# Altium PCB PCB4302.PcbDoc (part 1 of 2)
Units mil, origin at the board's own origin, x right, y up, seen from the top; angles counter-clockwise.
Board outline 1574.8 x 1476.38 mil, 4 copper layers (Top, Inner Layer 2, Inner Layer 3, Bottom), stack 35.4 mil thick; 37 components, 68 nets, 208 pads, 290 vias.
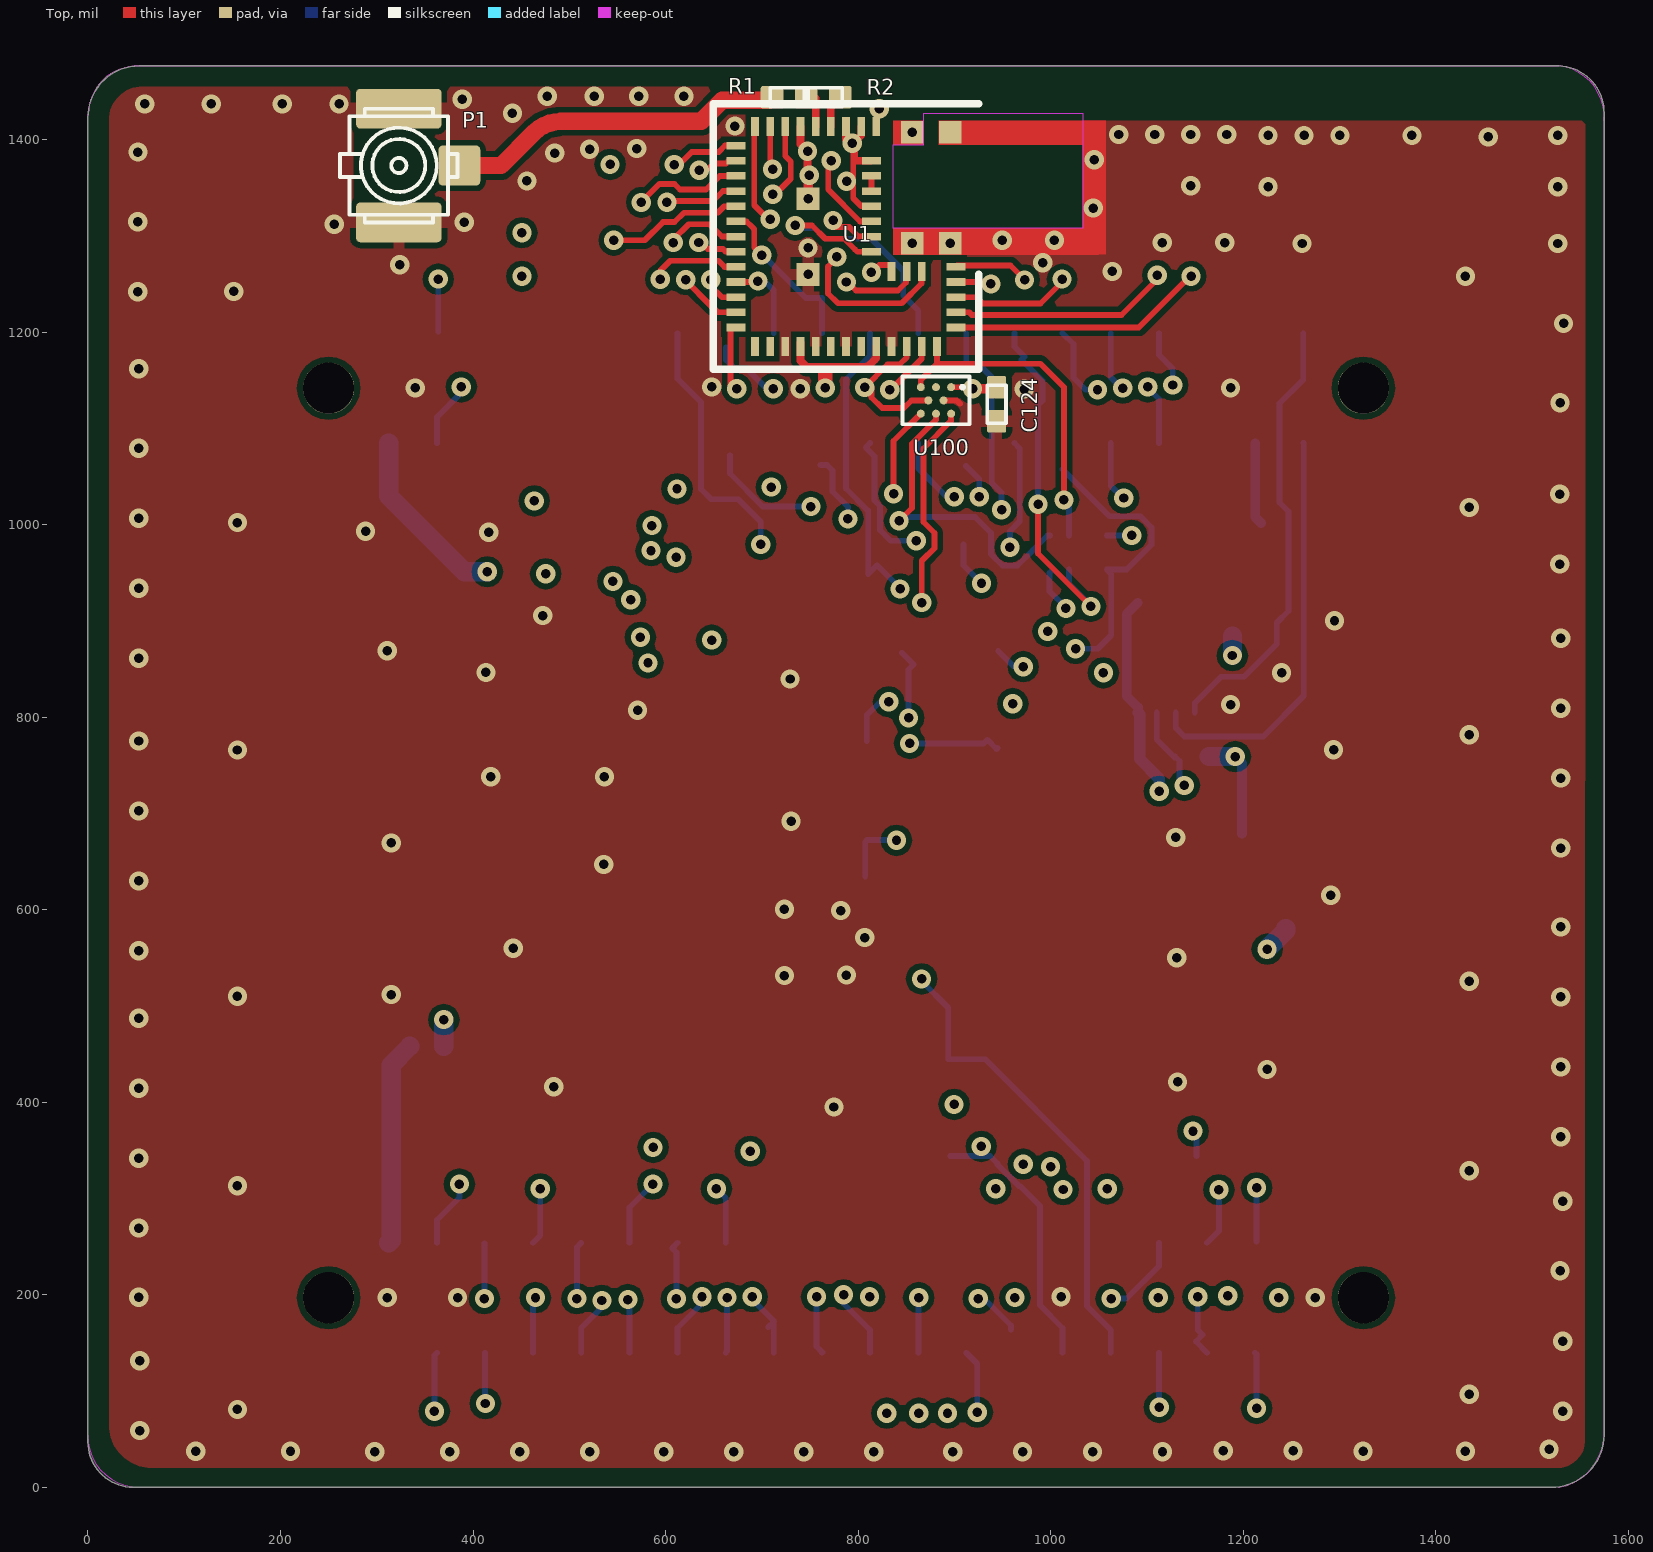
[diagram p0: Top view]
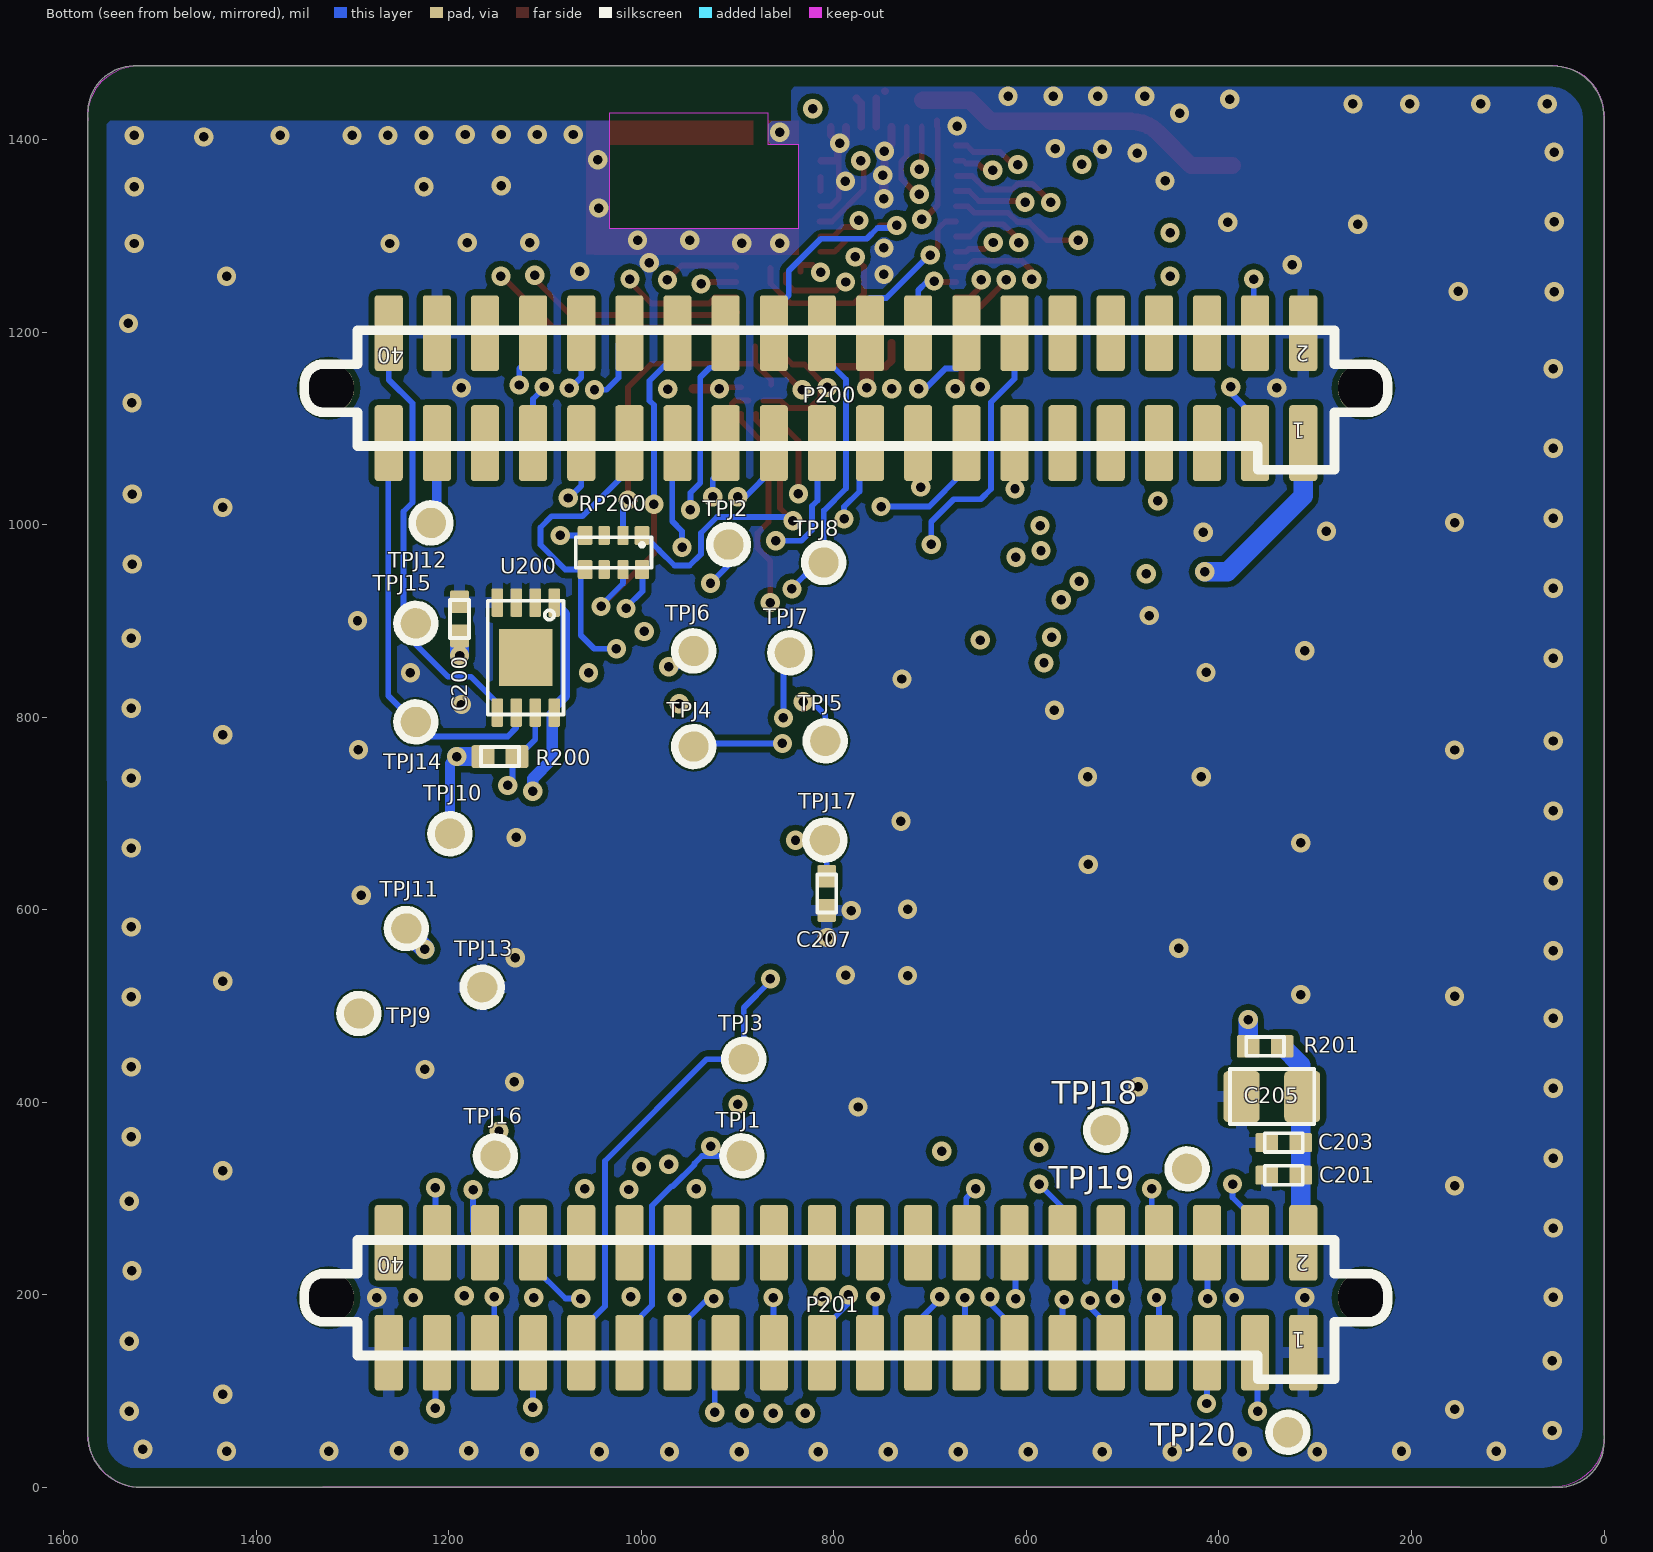
[diagram p1: Bottom view, seen from below]
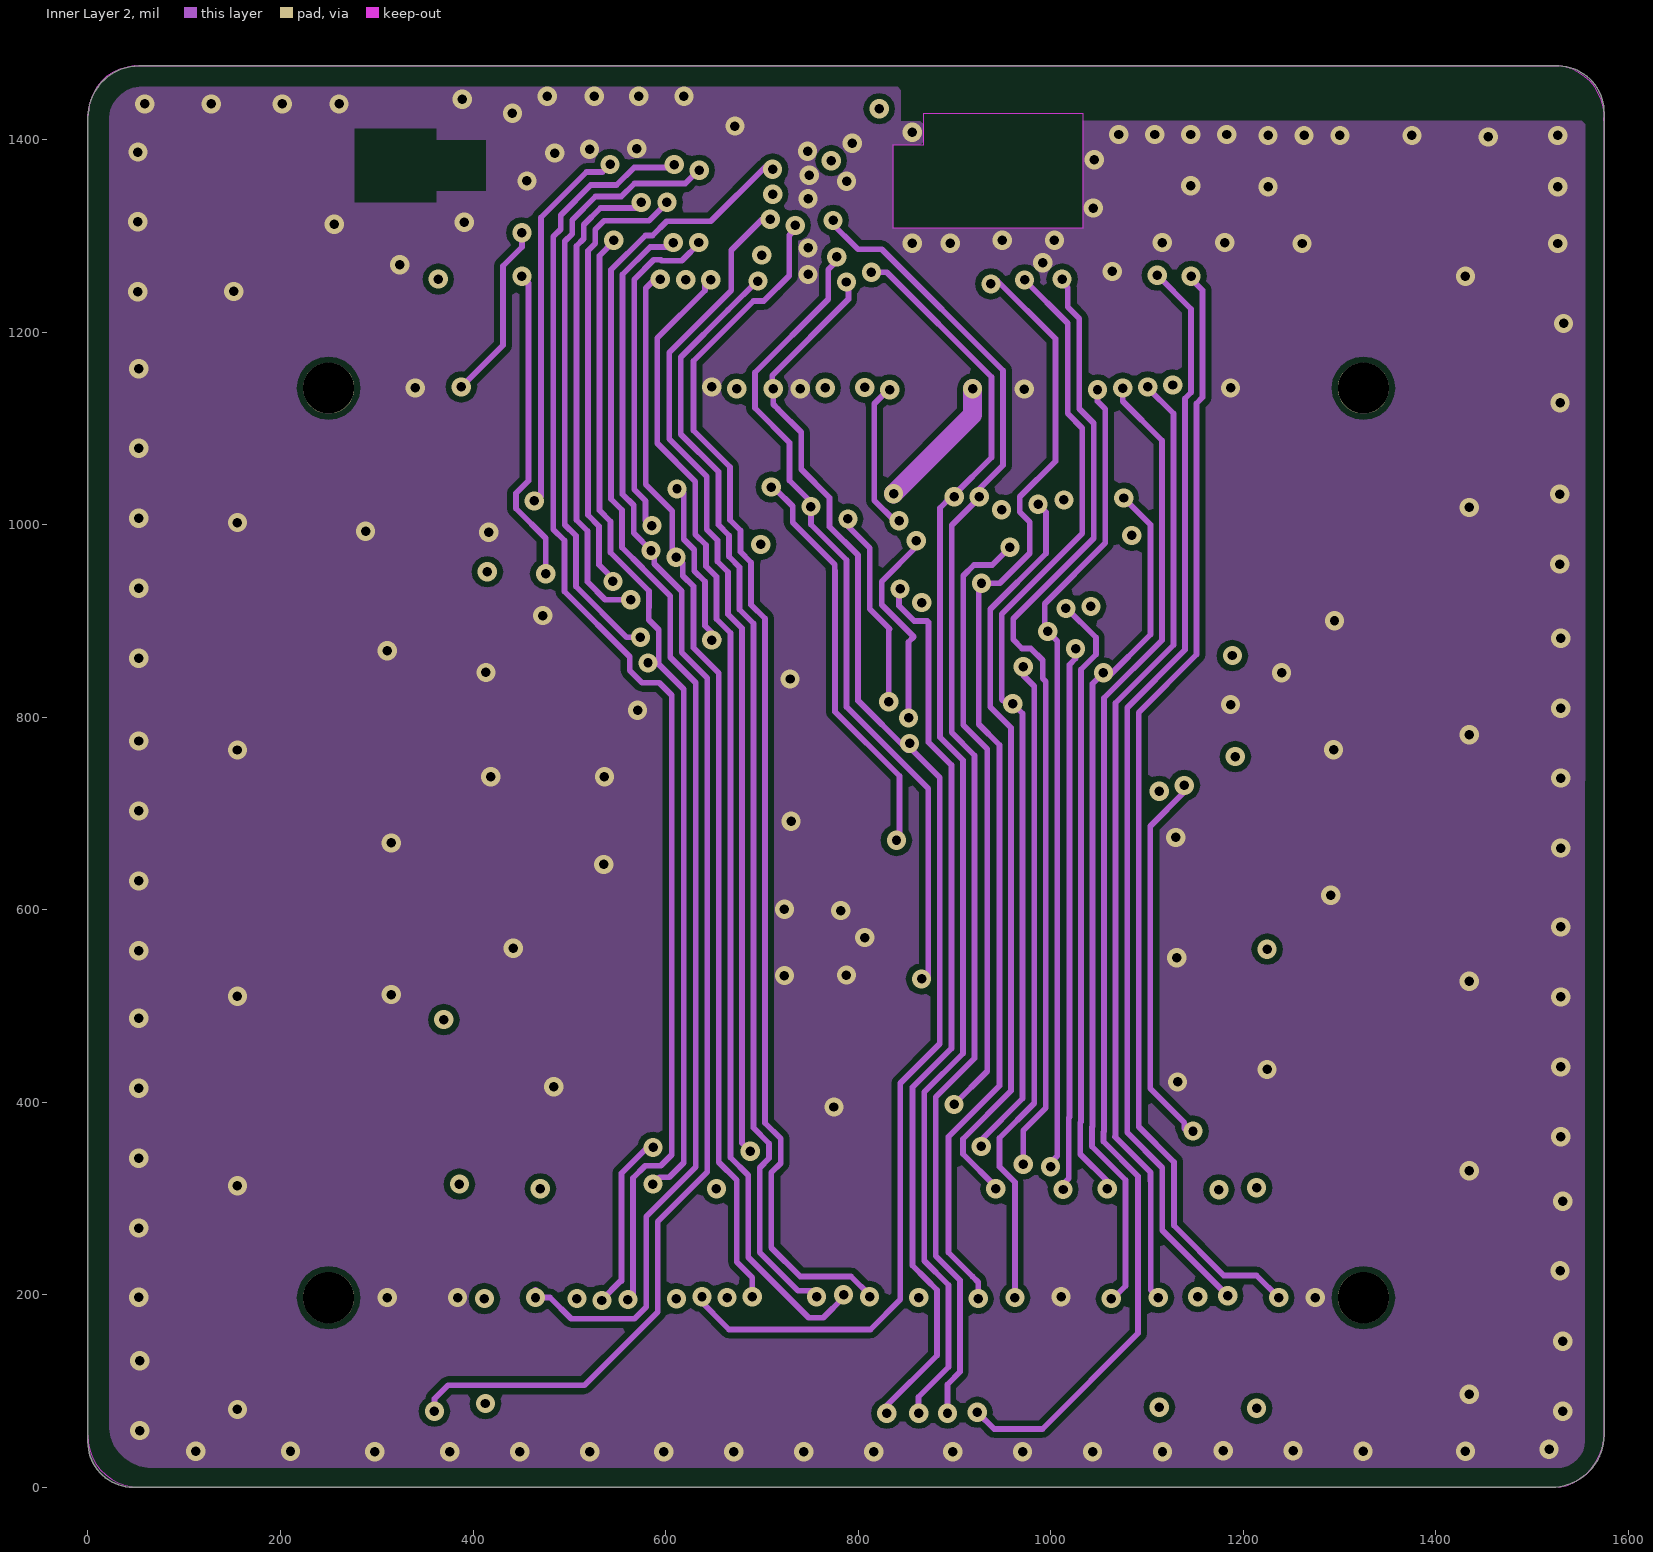
[diagram p2: Inner Layer 2]
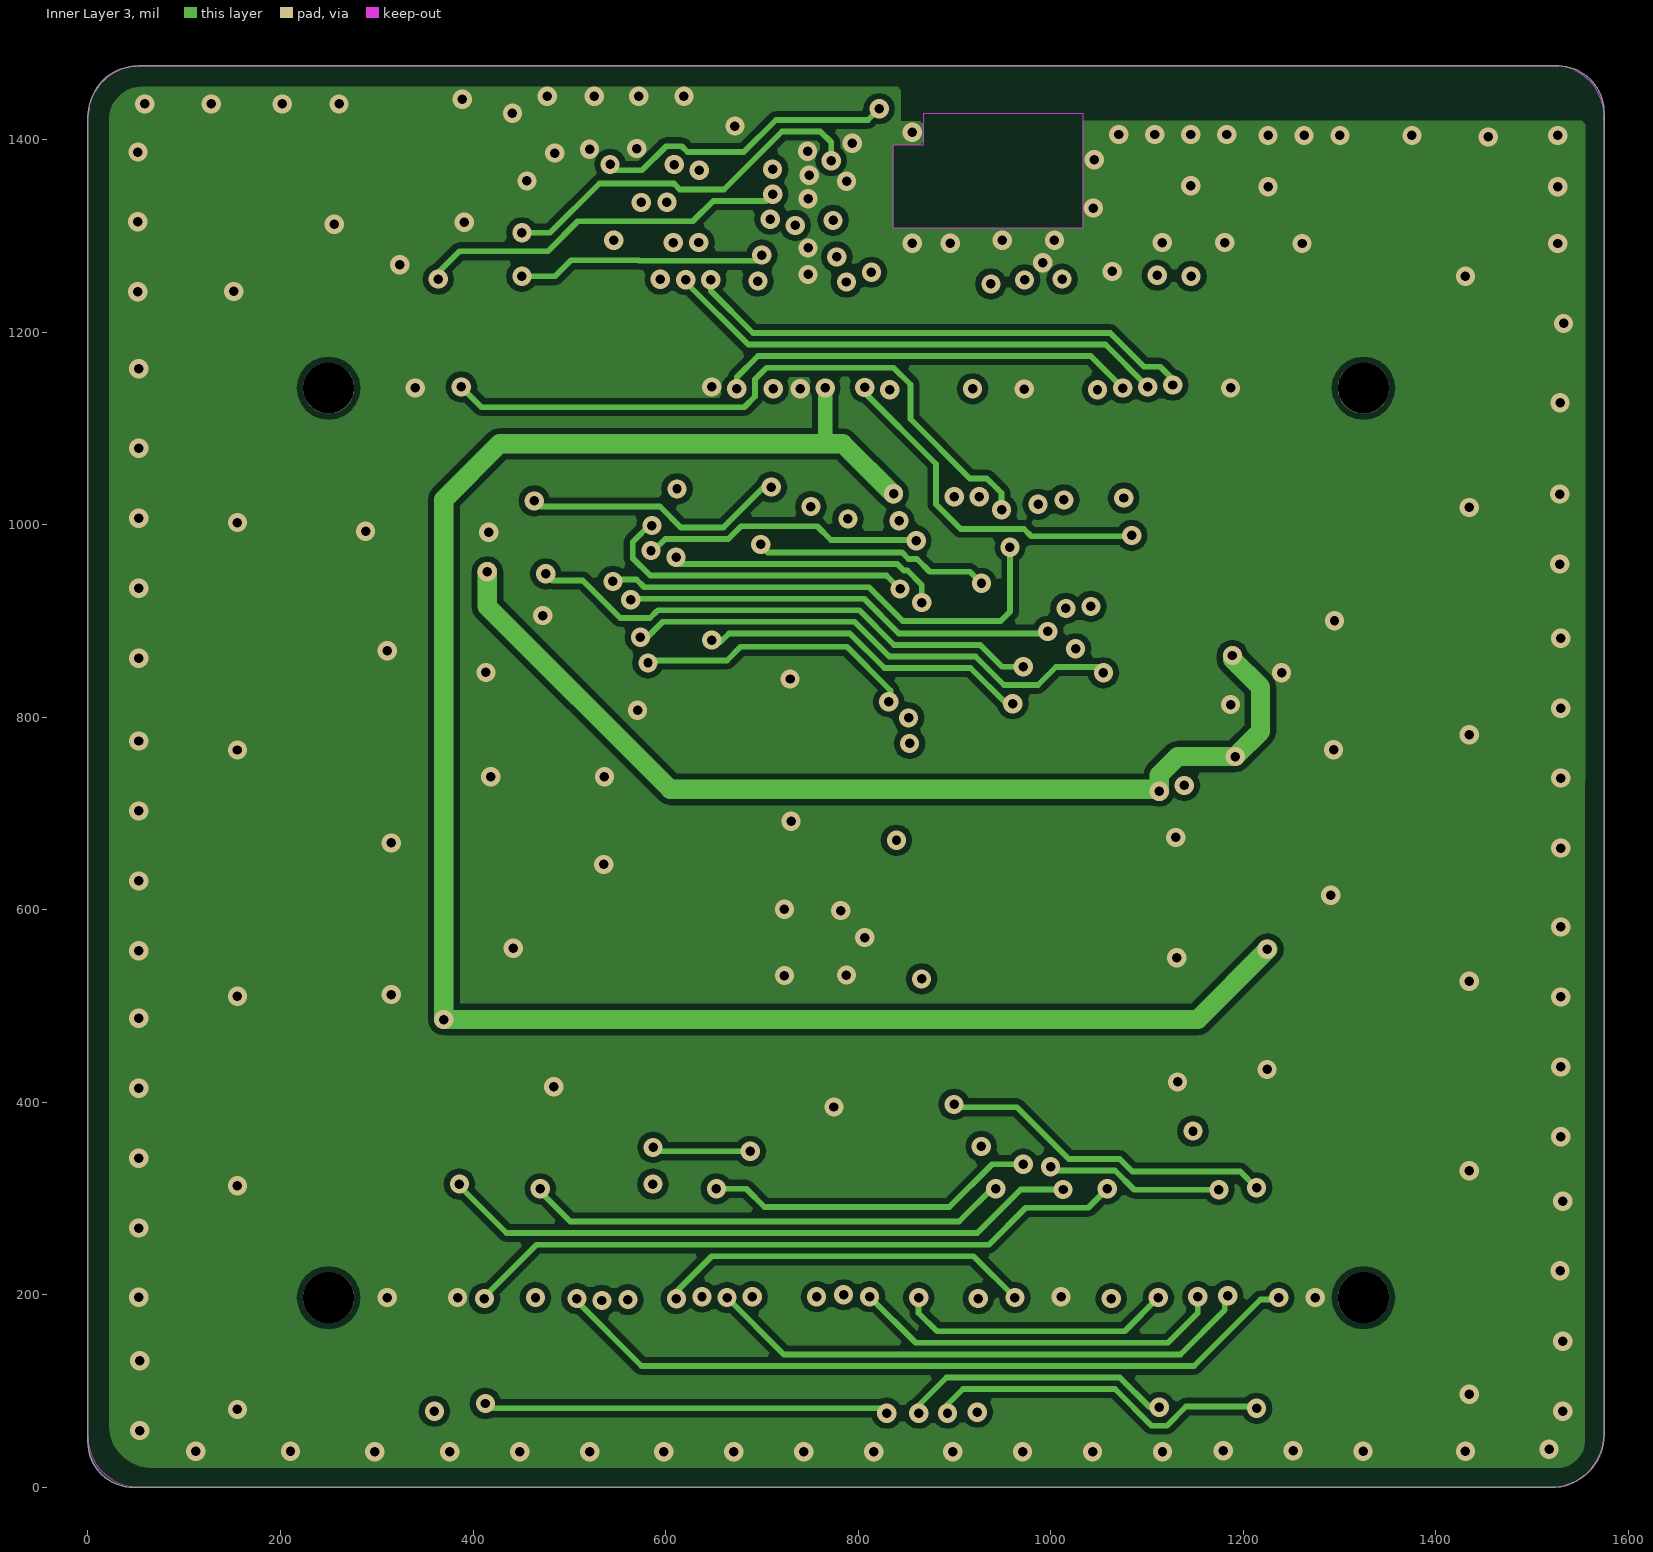
[diagram p3: Inner Layer 3]

## Layer stack, top to bottom
Solder Mask Top: solder mask 0.4, Solder Resist, Dk 3.5
Top: signal copper 1.35
Dielectric 1: dielectric 10, FR-4, Dk 4.3
Inner Layer 2: signal copper 1.35
Dielectric2: dielectric 10, FR-4, Dk 4.3
Inner Layer 3: signal copper 1.35
Dielectric3: dielectric 10, FR-4, Dk 4.3
Bottom: signal copper 1.35
Solder Mask Bottom: solder mask 0.4, Solder Resist, Dk 3.5

## Board outline
46.75,0 cw(c46.96,46.96) 0,47.18 0,1423.11 cw(c53,1423.38) 52.74,1476.38 1527.85,1476.38 cw(c1526.72,1428.3) 1574.8,1427.17 1574.8,54.22 cw(c1520.4,54.4) 1520.21,0

## Design rules (kind name [scope] priority, off if disabled: settings)
Clearance [All] p1: gap=6
Clearance 50Ohm [InNet('NetP1_1')] p2: gap=10
ComponentClearance "ComponentClearance -jumper overlap" [InComponent('R1') OR InComponent('R2') OR InComponent('U1') vs InComponent('R1') OR InComponent('R2') OR InComponent('U1')] p1: gap=0 collisioncheckmode=3 verticalgap=0 showdistances=FALSE
ComponentClearance "ComponentClearance - Default - DEFAULT" [All] p2: gap=6 collisioncheckmode=3 verticalgap=10 showdistances=FALSE
FanoutControl Fanout_Small [(CompPinCount < 5)] p3: bgadir=Out bgaviamode=Centered fanoutstyle=Auto fanoutdirection=OutThenIn viagrid=1 // Fanout_Small (Default Rule)
FanoutControl Fanout_SOIC [IsSOIC] p4: bgadir=Out bgaviamode=Centered fanoutstyle=Auto fanoutdirection=Alternating viagrid=1 // Fanout_SOIC (Default Rule)
HoleToHoleClearance HoleToHoleClearance-U1toPAD [Incomponent('U1') vs IsVia] p1: gap=0 allowstackedmicrovias=TRUE
HoleToHoleClearance HoleToHoleClearance-AT1toPAD [Incomponent('AT1') vs IsPAD] p2: gap=0 allowstackedmicrovias=TRUE
HoleToHoleClearance HoleToHoleClearance-U201toPAD [Incomponent('U201') vs IsVia] p3: gap=0 allowstackedmicrovias=TRUE
HoleToHoleClearance "HoleToHoleClearance - Default - DEFAULT" [All] p4: gap=6 allowstackedmicrovias=TRUE
MaxMinImpedance "Default Impedance" [All] p1: minimum=50.00 maximum=150.0
MinimumSolderMaskSliver [All] p1: minsoldermaskwidth=4
PlaneClearance [All] p1: clearance=6
PlaneConnect "Default PlaneConnect" [All] p1: planeconnectstyle=Relief reliefexpansion=20 reliefentries=4 reliefconductorwidth=16 reliefairgap=6
PolygonConnect "PolygonConnect _ GND Via" [IsVIa] p1: connectstyle=Direct reliefconductorwidth=10 reliefentries=4 polygonreliefangle="90 Angle" airgapwidth=10
PolygonConnect "PolygonConnect - Default SMT" [IsSMTPin] p2: connectstyle=Relief reliefconductorwidth=12 reliefentries=4 polygonreliefangle="90 Angle" airgapwidth=6
PolygonConnect "PolygonConnect - Default Pad" [All] p3: connectstyle=Relief reliefconductorwidth=16 reliefentries=4 polygonreliefangle="45 Angle" airgapwidth=6
RoutingLayers "RoutingLayers - Default - DEFAULT" [All] p1: top layer_v5=TRUE mid layer 1_v5=TRUE mid layer 2_v5=TRUE bottom layer_v5=TRUE
RoutingPriority "RoutingPriority - Default - DEFAULT" [All] p1: routingpriority=3
RoutingTopology "Default Routing Topology" [All] p1: topology=Shortest
RoutingVias "RoutingVias - Default - DEFAULT" [All] p1: holewidth=6 width=15 viastyle="Through Hole" minholewidth=6 minwidth=15 maxholewidth=10 maxwidth=20
SilkToSilkClearance [All] p1: silktosilkclearance=4
SilkToSolderMaskClearance [IsPad] p1: minsilkscreentomaskgap=4 clearancetoexposedcopper=TRUE
SolderMaskExpansion SolderMaskExpansion_via [IsVia] p1: expansion=-100
SolderMaskExpansion [All] p2: expansion=2
Width "Default Width" [All] p1: maxlimit=50 minlimit=6 preferedwidth=6 minimp=50.000000 maximp=50.000000 favimp=50.000000
18 further rules are at their usual default settings.

## Classes and differential pairs
component class "01_ Title Page": PCB1
component class "02_ RF, Antenna and Pow": P1 R1 R2 SH101
component class "03_ EFR32 I_O Port Conn": C124 C207 RP200 U1 U100
component class "04_ WSTK Connectors & B": C200 C201 C203 C205 P200 P201 R200 R201 TPJ1 TPJ2 TPJ3 TPJ4 TPJ5 TPJ6 TPJ7 TPJ8 TPJ9 TPJ10 TPJ11 TPJ12 TPJ13 TPJ14 TPJ15 TPJ16 TPJ17 TPJ18 TPJ19 TPJ20 U200
net class RADIO_PA[5..0]: RADIO_PA0 RADIO_PA1 RADIO_PA2 RADIO_PA3 RADIO_PA4 RADIO_PA5
net class RADIO_PB[15..11]: RADIO_PB11 RADIO_PB12 RADIO_PB13 RADIO_PB14 RADIO_PB15
net class RADIO_PC[11..6]: RADIO_PC6 RADIO_PC7 RADIO_PC8 RADIO_PC9 RADIO_PC10 RADIO_PC11
net class RADIO_PD[15..9]: RADIO_PD9 RADIO_PD10 RADIO_PD11 RADIO_PD12 RADIO_PD13 RADIO_PD14 RADIO_PD15
net class RADIO_PF[7..0]: RADIO_PF0 RADIO_PF1 RADIO_PF2 RADIO_PF3 RADIO_PF4 RADIO_PF5 RADIO_PF6 RADIO_PF7
net class WSTK_F[21..0]: WSTK_F4 WSTK_F15 WSTK_F16
net class WSTK_P[45..0]: WSTK_P3 WSTK_P15 WSTK_P17 WSTK_P19 WSTK_P21 WSTK_P23 WSTK_P25 WSTK_P27 WSTK_P29 WSTK_P38 WSTK_P39 WSTK_P40 WSTK_P41 WSTK_P42 WSTK_P43 WSTK_P44 WSTK_P45

## Components (designator, comment, footprint, x,y, rotation, side; value= is the part's Value field where it differs from the comment)
C124 "0.1uF" C0402_L 943.9,1125 r270 top
C200 "100N" C0402_L 1188.85,902 r90 bottom
C201 "100N" C0402_L 332.67,324.14 r0 bottom
C203 "100N" C0402_L 332.67,357.99 r0 bottom
C205 "10U" C0805_L 344.97,405.82 r0 bottom
C207 "100N" C0402_L 807.4,616.85 r270 bottom
P1 "U.FL" "COAX_HIROSE_U.FL_CL331-0471 - duplicate" 322.85,1373 r270 top
P200 "SOCKET_2X20_1.27MM_SMD" SAM_SFC-120-T2-D-A-2X20_SNUM 787.4,1141.73 r0 bottom locked
P201 "SOCKET_2X20_1.27MM_SMD" SAM_SFC-120-T2-D-A-2X20_SNUM 787.4,196.85 r0 bottom locked
R1 "0R" R0402_L 728.35,1443.9 r180 top
R2 "0R" R0402_L 763.78,1443.9 r180 top
R200 "10K" R0402_L 1146.85,759 r0 bottom
R201 "0R" R0402_L 351.96,457.99 r0 bottom
RP200 "100R" RES_MNR04-8 1028.85,971 r0 bottom
TPJ1 "PCB_PAD" TP_1.0_SMD 895.67,344.21 r180 bottom locked
TPJ2 "PCB_PAD" TP_1.0_SMD 909.45,979.25 r180 bottom locked
TPJ3 "PCB_PAD" TP_1.0_SMD 893.7,444.61 r180 bottom locked
TPJ4 "PCB_PAD" TP_1.0_SMD 945.67,769.41 r180 bottom locked
TPJ5 "PCB_PAD" TP_1.0_SMD 809.05,775.32 r180 bottom locked
TPJ6 "PCB_PAD" TP_1.0_SMD 945.67,868.72 r180 bottom locked
TPJ7 "PCB_PAD" TP_1.0_SMD 845.67,866.93 r180 bottom locked
TPJ8 "PCB_PAD" TP_1.0_SMD 810.63,960.63 r180 bottom locked
TPJ9 "PCB_PAD" TP_1.0_SMD 1293.31,492.13 r180 bottom locked
TPJ10 "PCB_PAD" TP_1.0_SMD 1198.82,678.86 r180 bottom locked
TPJ11 "PCB_PAD" TP_1.0_SMD 1244.09,580.43 r180 bottom locked
TPJ12 "PCB_PAD" TP_1.0_SMD 1218.5,1001.69 r180 bottom locked
TPJ13 "PCB_PAD" TP_1.0_SMD 1165.35,519.41 r180 bottom locked
TPJ14 "PCB_PAD" TP_1.0_SMD 1234.25,795 r180 bottom locked
TPJ15 "PCB_PAD" TP_1.0_SMD 1234.25,897.36 r180 bottom locked
TPJ16 "PCB_PAD" TP_1.0_SMD 1151.57,344.21 r180 bottom locked
TPJ17 "PCB_PAD" TP_1.0_SMD 809.35,672.23 r180 bottom locked
TPJ18 "PCB_PAD" TP_1.0_SMD 517.72,370.87 r90 bottom
TPJ19 "PCB_PAD" TP_1.0_SMD 433.07,330.71 r90 bottom
TPJ20 "PCB_PAD" TP_1.0_SMD 328.35,57.09 r90 bottom
U1 "BGM121" EFR_SIP 787.4,1299.21 r270 top
U100 "MX25R8035F" BGA8_M040_1.24x1.75_WLCSP 880.85,1129 r270 top
U200 "24AA024" TDFN8_M050_2.0x3.0_EP 1120.08,861.81 r0 bottom

## Footprints (in the part's own frame and the unit in brackets; to place one, negate y for a bottom-side part, rotate by r counter-clockwise, add the part's x,y. Pads: shape width x height; smd on the part's side, far side on the other; paste and mask are expansions set on the pad)
BGA8_M040_1.24x1.75_WLCSP [mm] "BGA, 8 pin. U100"
  round 0.21 smd mask+0.051: A1(-0.35,0.4) A3(0.35,0.4) B2(0,0.2) C1(-0.35,0) C3(0.35,0) D2(0,-0.2) E1(-0.35,-0.4) E3(0.35,-0.4)
  silkscreen extent -0.63,-0.89 0.63,0.88, body extent -0.63,-0.89 0.63,0.88, height 0.52
C0402_L [mm] "Chip Capacitor, 2-Leads, Body 1.0x0.5mm, IPC High Density"
  rrect20% 0.6x0.5 smd mask+0.051: 1(-0.45,0) 2(0.45,0)
  silkscreen extent -0.5,-0.25 0.5,0.25, body extent -0.5,-0.25 0.5,0.25, height 0.6
C0805_L [mm]
  rrect25% 0.95x1.35 smd: 1(-0.8,0) 2(0.8,0)
  silkscreen extent -1.12,-0.72 1.1,0.72, body extent -1.1,-0.72 1.1,0.72, height 1.45
"COAX_HIROSE_U.FL_CL331-0471 - duplicate" [mm]
  rrect20% 1.05x1.1 smd mask+0.051: 1(0,1.6)
  rrect20% 1.05x2.25 smd mask+0.051: 2(-1.5,0) 3(1.5,0)
  Top pour cut-out: -0.85,0.9 0.85,0.9 0.85,0.9 0.85,-1.2 -0.85,-1.2 -0.85,-1.2
  silkscreen extent -1.5,-1.55 1.5,1.55, body extent -1.3,-1.55 1.3,1.3, height 0.9
EFR_SIP [mm]
  rect 0.5x0.2 smd mask+0.015: 1(-2.9,0.8) 2(-2.9,0.4) 3(-2.9,0) 4(-2.9,-0.4) 5(-2.9,-0.8) 6(-2.9,-1.2) 7(-2.9,-1.6) 8(-2.9,-2) 9(-2.9,-2.4) 23(2.9,-2.4) 24(2.9,-2) 25(2.9,-1.6) 26(2.9,-1.2) 27(2.9,-0.8) 28(2.9,-0.4) 29(2.9,0) 30(2.9,0.4) 31(2.9,0.8) 32(2.9,1.2) 33(2.9,1.6) 34(2.9,2) 35(2.9,2.4) 41(0.925,2) 42(0.925,1.6) 43(0.925,1.2)
  rect 0.2x0.5 smd mask+0.015: 10(-2.4,-2.9) 11(-2,-2.9) 12(-1.6,-2.9) 13(-1.2,-2.9) 14(-0.8,-2.9) 15(-0.4,-2.9) 16(0,-2.9) 17(0.4,-2.9) 18(0.8,-2.9) 19(1.2,-2.9) 20(1.6,-2.9) 21(2,-2.9) 22(2.4,-2.9) 36(2.4,2.9) 37(2,2.9) 38(1.6,2.9) 39(1.2,2.9) 40(0.8,2.9) 44(0.4,0.675) 45(0,0.675) 46(-0.4,0.675) 47(-0.8,0.675) 48(-1.2,0.675) 49(-1.6,0.675) 50(-2,0.675)
  rect 0.6x0.6 smd mask+0.015: 51(-1,-1) 52(1,-1) 53(-2.75,2.75) 54(-2.75,1.75) 55(0.175,1.75) 56(0.175,2.75)
  Top region: -3.05,2.05 -3.05,1.25 -2.425,1.25 -2.425,2.05
  Top region: -0.225,3.05 -0.225,1.25 0.475,1.25 0.475,3.05
  Top pour cut-out: -0.225,1.25 -2.425,1.25 -2.425,2.05 -3.25,2.05 -3.25,2.45 -2.425,2.45 -2.425,6.25 -0.225,6.25
  Top region: -3.05,2.45 -2.425,2.45 -2.425,6.65 -3.05,6.65
  Top region: -3.05,6.25 0.463,6.25 0.463,6.85 -3.05,6.85
  Top region: -0.225,2.45 0.475,2.45 0.475,6.65 -0.225,6.65
  Keep-Out Layer pour cut-out: -3.25,6.25 -0.225,6.25 -0.225,1.25 -2.425,1.25 -2.425,2.05 -3.25,2.05 -3.25,2.45
  silkscreen extent -3.5,-3.5 3.5,3.5
R0402_L [mm] "Chip Resistor, 2-Leads, Body 1.0x0.5mm, IPC High Density"
  rrect20% 0.6x0.6 smd mask+0.051: 1(-0.45,0) 2(0.45,0)
  silkscreen extent -0.5,-0.25 0.5,0.25, body extent -0.5,-0.25 0.5,0.25, height 0.6
RES_MNR04-8 [mm] "Chip resistor network 8pin"
  rrect20% 0.39x0.5 smd mask+0.051: 1(-0.75,-0.45) 4(0.75,-0.45) 5(0.75,0.45)
  rrect20% 0.3x0.5 smd mask+0.051: 2(-0.25,-0.45) 3(0.25,-0.45) 6(0.25,0.45) 7(-0.25,0.45)
  rrect20% 0.38x0.5 smd mask+0.051: 8(-0.75,0.45)
  silkscreen extent -1,-0.4 1,0.4, body extent -1,-0.4 1,0.4, height 0.5
SAM_SFC-120-T2-D-A-2X20_SNUM [mm]
  rrect20% 0.74x2 smd mask+0.05: 1(-12.065,1.45) 2(-12.065,-1.45) 3(-10.795,1.45) 4(-10.795,-1.45) 5(-9.525,1.45) 6(-9.525,-1.45) 7(-8.255,1.45) 8(-8.255,-1.45) 9(-6.985,1.45) 10(-6.985,-1.45) 11(-5.715,1.45) 12(-5.715,-1.45) 13(-4.445,1.45) 14(-4.445,-1.45) 15(-3.175,1.45) 16(-3.175,-1.45) 17(-1.905,1.45) 18(-1.905,-1.45) 19(-0.635,1.45) 20(-0.635,-1.45) 21(0.635,1.45) 22(0.635,-1.45) 23(1.905,1.45) 24(1.905,-1.45) 25(3.175,1.45) 26(3.175,-1.45) 27(4.445,1.45) 28(4.445,-1.45) 29(5.715,1.45) 30(5.715,-1.45) 31(6.985,1.45) 32(6.985,-1.45) 33(8.255,1.45) 34(8.255,-1.45) 35(9.525,1.45) 36(9.525,-1.45) 37(10.795,1.45) 38(10.795,-1.45) 39(12.065,1.45) 40(12.065,-1.45)
  round 1.35 hole 1.35 unplated paste-5.563 mask-5.563: M1(13.652,0) M2(-13.652,0)
  silkscreen extent -14.29,-1.53 14.29,2.15, body extent -14.65,-1.58 14.65,2.25, height 4.57
TDFN8_M050_2.0x3.0_EP [mm] "TDFN8_M050_2.0x3.0_EP"
  rrect20% 0.3x0.75 smd mask+0.051: 1(-0.75,-1.45) 2(-0.25,-1.45) 3(0.25,-1.45) 4(0.75,-1.45) 5(0.75,1.45) 6(0.25,1.45) 7(-0.25,1.45) 8(-0.75,1.45)
  rect 1.4x1.5 smd mask+0.051: 9(0,0)
  silkscreen extent -1,-1.5 1,1.5, body extent -1,-1.5 1,1.5, height 1
TP_1.0_SMD [mm]
  round 1 smd paste-0.501: 1(0,0)
  silkscreen extent -0.5,-0.5 0.5,0.5

## Part data
C124: library part CAP_NP, "CAP, 0.1uF, 10V, ±10%, X7R, 0402"
C200 C207: library part CAPACITOR
C201 C203: library part C0402
C205: library part C0805
P1: library part HIROSE_U.FL
R1 R2 R201: library part R0402
R200: library part RESISTOR
RP200: library part MNR04M0APJ101
TPJ1 TPJ2 TPJ3 TPJ4 TPJ5 TPJ6 TPJ7 TPJ8 TPJ9 TPJ10 TPJ11 TPJ12 TPJ13 TPJ14 TPJ15 TPJ16 TPJ17 TPJ18 TPJ19 TPJ20: "PCB Feature, SINGLE PAD, SMD"
U100: library part MX25R8035, "Flash, Serial, 8M"

## Via types
v1: diameter 20, hole 9.84, Top to Bottom, tented both sides, 290 vias

## Nets (pads, with @x,y where several pads share a name; then routed paths per layer and width w, separated by ;. In a path a pad name is that pad's centre, name@x,y a point inside that pad or via, vN(x,y) a via of type N, cw(c..) or ccw(c..) an arc to the next point about the centre after c; other vN are vias at no path point)
3V3: C200.1 P200.1 R200.2 TPJ10.1 U200.1 U200.8 | length 1575
  Inner Layer 3 w20: v1(414.85,951) 414.85,914.87 604.72,725 1110.85,725 v1(1112.85,723) 1112.85,739.77 1132.08,759 v1(1191.85,759) 1217.85,785 1217.85,831.23 1188.85,860.23 v1(1188.85,864)
  Bottom w10: U200.1@1090.55,918.9 1078.85,907.2 1078.85,822 U200.8@1090.85,810 ; v1(1191.85,759) 1198.82,752.04 TPJ10.1@1198.82,678.86
  Bottom w12: U200.8@1090.85,804.43 1092.33,802.94 1092.33,756.59 1112.85,736.07 v1(1112.85,723)
  Bottom w20: P200.1@312.4,1084.65 312.4,1029.68 391.08,951 v1(414.85,951) ; R200.2@1164.57,759 v1(1191.85,759) ; v1(1188.85,864) C200.1@1188.85,884.28
5V: P200.37 TPJ12.1 | length 85.5
  Bottom w10: P200.37@1212.4,1084.65 1212.4,1007.79 TPJ12.1@1218.5,1001.69
BOARD_ID_SCL: P200.39 TPJ14.1 U200.6 | length 433
  Bottom w6: U200.6@1129.92,804.72 1129.92,788.93 1138.85,780 1220.85,780 1262.93,822.08 1262.93,1084.65 P200.39@1262.4,1084.65
BOARD_ID_SDA: P200.40 TPJ15.1 U200.5 | length 462.6
  Bottom w6: U200.5@1149.61,804.72 1149.61,814.76 1176.85,842 1200.85,842 1234.85,876 1234.85,898 1247.19,910.33 1247.19,1013.58 1237.85,1022.91 1237.85,1126 1262.4,1150.55 P200.40@1262.4,1198.82
BOARD_ID_WP: R200.1 TPJ16.1 U200.7 | length 514.3
  Inner Layer 2 w6: v1(1138.85,729) 1138.85,722.13 1103.46,686.74 1103.46,414.25 1138.85,378.85 1138.85,373 1141.85,370 v1(1147.85,370)
  Bottom w6: U200.7@1110.24,804.72 1110.24,776.61 R200.1@1128.85,758 ; R200.1@1129.13,759 1133.85,754.28 1133.85,729 v1(1138.85,729) ; v1(1147.85,370) 1151.57,366.28 TPJ16.1@1151.57,344.21
GND: C124.2 C200.2 C201.2 C203.2 C205.2 C207.2 P1.2 P1.3 P200.2 P200.38 P201.1 P201.39 TPJ13.1 U1.2 U1.3 U1.6 U1.25 U1.27 U1.29 U1.32 U1.47 U1.50 U1.51 U1.52 U1.53 U1.54 U1.55 U1.56 U100.B2 U200.2 U200.3 U200.4 | length 251.9
  Top w6: U1.52@742.01,1259.84 v1(748.03,1259.84) ; v1@787.4,1399.45 v1@791.85,1395 ; 795.85,1377.95 795.85,1376.56 794.93,1375.63 ; 795.85,1382 794.93,1381.08 794.93,1375.63 ; U1.47@813.98,1330.71 803.22,1330.71 794.93,1339 794.93,1348.09 795,1348.16 795,1375.56 794.93,1375.63 ; U100.B2@888.72,1129 902.5,1129 905.89,1125.61
  Top w8: U1.6@740.16,1413.39 740.16,1395.2 v1(747.46,1387.9) 747.46,1356.55 748.03,1357.12 v1@748.03,1361.76 ; v1@787.4,1399.45 U1.3@787.4,1413.39 ; v1@792.85,1396 795.85,1393 795.85,1382 ; 795.85,1377.95 U1.50@812.87,1377.95 ; v1@795.85,1397 803.15,1404.3 U1.2@803.15,1413.39
  Top w10: U1.51@748.03,1335.63 v1(748.03,1338.58) v1@748.03,1357.12
  other v1: 111.94,37.5 210.36,37.5 297.85,37 375.85,37 448.52,37 521.18,37 598.18,37 670.85,37 743.52,37 816.18,37 898.18,37 970.85,37 1043.52,37 1116.18,37 1324.54,37.5 1430.83,37.5 1179.18,38 1251.85,38 1517.72,39.37 53.75,58.87 1531.83,79 155.24,80.8 1434.77,96.55 53.75,131.54 1531.83,151.67 52.75,197.32 310.85,197 383.85,197 1274.85,197 1010.85,198 1529.13,224.88 52.75,269.21 1531.83,297 155.24,313.09 1434.77,328.83 52.75,341.87 1529.83,364 774.85,395 52.75,414.54 483.85,416 1131.85,421 1224.85,434 1529.83,436.67 52.75,487.21 1529.83,509.33 155.24,509.94 314.96,511.81 1434.77,525.68 723.43,531.5 787.85,532 1130.85,550 52.75,557.21 441.85,560 806.85,571 1529.83,582 781.85,599 723.43,600.39 1290.85,615 52.75,629.87 535.85,647 1529.83,664 314.96,669.29 1129.85,675 730.31,691.93 52.75,702.54 1529.83,736.67 418.31,738.19 536.42,738.19 155.24,765.84 1293.85,766 52.75,775.21 1434.77,781.59 570.87,807.09 1529.83,809.33 1186.85,813 729.36,839.61 413.39,846.46 1239.85,846 52.75,861.21 310.85,869 1529.83,882 1294.85,900 472.44,905.51 52.75,933.87 1528.83,959 416.34,992.13 288.39,993.11 155.24,1002.06 52.75,1006.54 1434.77,1017.81 1528.83,1031.67 52.75,1079.21 1529.13,1126.45 739.85,1141 972.44,1140.75 339.85,1142 1186.85,1142 647.85,1143 52.75,1161.88 1532.83,1209 51.75,1241.87 151.31,1242.22 1430.83,1257.97 1063.85,1263 323.85,1270 991.85,1272 748.03,1287.4 856.3,1292.32 895.67,1292.32 1261.18,1292 1526.83,1292 1115.85,1293 1180.85,1293 949.8,1295.28 1003.94,1295.28 255.85,1312 51.75,1314.54 390.85,1314 1044.29,1328.74 1225.85,1351 1526.83,1351 1145.52,1352 456,1357 787.98,1356.77 749.11,1362.84 1045.28,1378.94 484.91,1385.89 51.85,1387 521,1390 569.94,1390.59 793.85,1396 1454.46,1402.65 1225.85,1404.2 1263.18,1404.2 1300.52,1404.2 1375.32,1404.2 1526.83,1404.2 1070.85,1405.2 1108.18,1405.2 1145.52,1405.2 1182.85,1405.2 856.3,1407.48 672,1414 440.94,1427.17 59.06,1437.01 127.95,1437.01 201.77,1437.01 260.83,1437.01 388.78,1441.93 477,1445 526,1445 572,1445 619,1445
NetP1_1: P1.1 R1.2 | length 348.1
  Top w18: P1.1@385.84,1373 429.11,1373 463.23,1407.12 cw(c491.22,1379.13) 491.22,1418.71 ; 491.22,1419 637,1419 658.93,1440.93 R1.2@707.66,1440.93
NetR1_1: R1.1 R2.2 U1.5 | length 30.2
  Top w8: R1.1@746.57,1450 R1.1@747.13,1450 ; U1.5@755.91,1413.39 R1.1@755.91,1443
NetR2_1: R2.1 U1.4 | length 31.4
  Top w8: U1.4@771.65,1413.39 771.65,1437.8 R2.1@776.57,1442.72
NetU1_48: U1.48 U1.49 | length 14.8
  Top w6: U1.48@813.98,1346.46 U1.49@813.98,1361.22
RADIO_PA0: P200.19 P201.12 TPJ5.1 U1.14 | length 1882.8
  Top w6: v1@547.24,1295.28 578.44,1295.28 597.44,1314.28 609.29,1314.28 619.03,1324.02 654.26,1324.02 660.95,1330.71 U1.14@673.23,1330.71
  Inner Layer 2 w6: v1@546.26,1294.29 531.35,1279.38 531.35,1014.83 542.85,1003.32 542.85,970.93 582.85,930.93 582.85,914.13 582.49,913.77 582.49,901.23 592.85,890.87 592.85,856.34 ; v1(586.85,315) 593.85,322 603.75,322 618.91,337.16 618.91,828.93 592.85,854.98 ; v1(789.37,1005.91) 789.37,998.29 812.01,975.65 812.01,912.29 832.85,891.45 831.72,890.32 v1(831.72,815.98)
  Inner Layer 3 w6: v1@580.71,855.31 584.29,858.89 663.74,858.89 677.85,873 788.42,873 833.66,827.76 833.66,816.81 832.84,815.98 v1(831.72,815.98)
  Bottom w6: P201.12@562.4,253.94 562.4,290.55 v1(586.85,315) ; P200.19@760.83,1062.01 767.72,1062.01 773.5,1056.22 773.5,1034.33 789.37,1018.46 v1(789.37,1005.91) ; TPJ5.1@809.05,775.32 809.05,802.2 826.85,820 830.87,815.98 v1(831.72,815.98)
  other v1: 581.71,856.34 546.26,1295.28
RADIO_PA1: P200.20 P201.14 TPJ6.1 U1.15 | length 2454.9
  Top w6: U1.15@673.23,1314.96 684,1314.96 689.63,1309.33 692.07,1306.88 692.07,1287.93 v1(700,1280)
  Inner Layer 2 w6: v1@457.68,1250.98 457.68,1045.57 444.58,1032.48 444.58,1016.74 475.39,985.93 v1(475.39,948.82) ; v1(962.85,197) 962.85,316.87 946.85,332.87 946.85,362.87 982.85,398.87 982.85,832 971.46,843.39 971.49,843.43 v1(971.49,852.4)
  Inner Layer 3 w6: v1(450.79,1257.87) 485.24,1257.87 501.85,1274.48 572.13,1274.48 572.62,1274 694.25,1274 v1@700.04,1279.79 ; v1@482.21,942 513.85,942 552.85,903 583.85,903 590.85,910 591.01,910 592.01,911 801.33,911 837.33,875 926.79,875 949.39,852.4 v1(971.49,852.4) ; v1(611.24,195.88) 609.97,195.88 606.85,199 647.85,240 919.85,240 v1(962.85,197)
  Bottom w6: v1(611.24,195.88) 611.24,244 606.85,248.39 P201.14@612.4,253.94 ; v1(700,1280) 701,1280 745.56,1235.45 762.4,1235.45 P200.20@762.4,1198.82 ; TPJ6.1@945.67,868.72 961.98,852.4 v1(971.49,852.4)
RADIO_PA2: P200.21 P201.3 TPJ7.1 U1.16 | length 2345.3
  Top w6: v1(608,1293) 608,1296.02 624,1312.02 645.7,1312.02 658.51,1299.21 U1.16@673.23,1299.21
  Inner Layer 2 w6: v1(359.85,79) 359.85,92 373.85,106 515.69,106 591.85,182.16 591.85,276.16 643.28,327.59 643.28,840.73 616.85,867.16 616.85,930.87 588.29,959.43 v1@588.29,968.56 ; v1@584.85,973.13 566.85,991.13 566.85,1020.06 555.35,1031.56 555.35,1259.66 584.07,1288.39 608.27,1288.39 608.98,1289.1 608,1290.09 v1(608,1293) ; v1(852.36,799.21) 852.36,877.93 857.85,883.42 824.54,916.73 824.54,940.99 861.22,977.67 v1@861.22,982.28
  Inner Layer 3 w6: v1(584.85,973) 587.72,973 599.72,985 664.98,985 678.36,998.38 757.53,998.38 771.91,984 v1@859.98,984
  Bottom w6: v1(359.85,79) 359.85,137.21 P201.3@362.4,139.76 ; P200.21@812.4,1084.65 807.85,1080.09 816.93,1071.02 816.93,1025.05 822.63,1019.35 822.63,994.3 833.66,983.27 v1@860.27,983.27 ; TPJ7.1@845.67,866.93 857.85,854.75 852.36,849.26 v1(852.36,799.21)
  other v1: 860.27,983.32
RADIO_PA3: P200.22 P201.5 TPJ8.1 U1.17 | length 2443.6
  Top w6: v1@640.75,1289.37 643.7,1286.42 659.52,1286.42 659.66,1286.28 ; 659.69,1286.28 662.5,1283.46 U1.17@673.23,1283.46
  Inner Layer 2 w6: v1@579.27,1004.58 579.27,1024.61 567.35,1036.53 567.35,1254.69 587.66,1275 595.06,1275 596.06,1274 616.85,1274 635.83,1292.97 v1@635.83,1293.31 ; v1(829.85,77) 829.85,85 881.85,137 881.85,204.87 870.72,216 870.72,216.13 856.61,230.24 856.61,415.44 896.85,455.68 896.85,750.31 873.15,774.01 873.15,898.5 871.69,899.96 858.28,899.96 842.52,915.72 v1@842.52,933.07
  Inner Layer 3 w6: v1(412.85,87) 417.85,82 830.85,82 829.85,81 v1(829.85,77) ; v1(585.85,999) 585.85,1000 584.85,1001 565.85,982 565.85,965.13 583.98,947 829.57,947 v1(843.54,933.12)
  Bottom w6: P201.5@412.4,139.76 412.4,87.45 v1(412.85,87) ; 810.04,1014.76 787.4,1037.4 787.4,1150.59 812.4,1175.59 P200.22@812.4,1198.82 ; 810.14,1014.87 810.63,1014.38 TPJ8.1@810.63,960.63 810.63,948.78 819.7,957.85 843.54,934.02 v1(843.54,933.12)
  other v1: 634.49,1293.02
RADIO_PA4: P201.17 U1.18 U100.A3 | length 1788.2
  Top w6: v1(594.51,1254.98) 594.51,1263.66 604.85,1274 655,1274 661.28,1267.72 U1.18@673.23,1267.72 ; v1(866.15,918.96) 866.15,962.33 879.27,975.45 879.27,991.19 867.85,1002.6 867.85,1079 896.6,1107.75 U100.A3@896.6,1115.22
  Inner Layer 2 w6: v1(594.51,1254.98) 594.51,1260.57 579.35,1245.45 579.35,1041.5 606.85,1014 606.85,971 v1@609.85,968 ; v1@617.85,960 617.85,946.84 628.85,935.84 628.85,872.13 655.28,845.7 655.28,337.66 673.85,319.09 673.85,234 690,217.85 v1(690,198)
  Inner Layer 3 w6: v1@610.85,959 840.74,959 847.43,952.32 851.21,952.32 866.15,937.37 v1(866.15,918.96)
  Bottom w6: v1(690,198) 690,195.06 712.85,172.21 706.74,166.11 712.4,171.76 P201.17@712.4,139.76
  other v1: 610.85,966
RADIO_PA5: P200.18 P201.19 U1.19 | length 1307.4
  Top w6: U1.19@673.23,1251.97 694.88,1251.97 v1@695.87,1252.95
  Inner Layer 2 w6: v1(695.89,1253.01) 695.89,1253.88 695.85,1253.92 664.96,1223.03 615.85,1173.92 615.85,1093.81 654.85,1054.81 654.85,999.78 665.85,988.78 665.85,966.72 676.85,955.72 676.85,911.81 691.28,897.38 691.28,373.44 707.52,357.2 707.52,341.65 697.85,331.98 697.85,243.94 737.64,204.15 751.7,204.15 757.85,198 v1(756.85,198)
  Bottom w6: v1@703.39,1252.46 712.4,1243.45 P200.18@712.4,1198.82 ; v1(756.85,198) 756.85,146.21 762.85,140.21 P201.19@762.4,139.76
RADIO_PB11: P200.34 P201.21 U1.20 | length 1922.9
  Top w6: v1@645.67,1253.94 645.67,1249.02 658.46,1236.22 U1.20@673.23,1236.22 ; v1@647.85,1253.94 v1@647.85,1256
  Inner Layer 2 w6: v1(646.85,1254.35) 646.85,1254.55 646.13,1255.28 640.85,1250 640.85,1243.21 591.35,1193.71 591.35,1084.37 630.85,1044.87 630.85,989.84 641.85,978.84 641.85,956.78 652.85,945.78 652.85,901.87 667.28,887.44 667.28,353.15 667.32,353.11 667.32,342.59 685.85,324.06 685.85,238.97 748.82,176 763.85,176 784.85,197 v1(784.85,200)
  Inner Layer 3 w6: v1(646.85,1254.35) 646.85,1243 690.85,1199 1061.82,1199 1096.82,1164 1113.85,1164 1126.85,1151 v1(1126.85,1145)
  Bottom w6: v1(784.85,200) 784.85,191 812.4,163.45 P201.21@812.4,139.76 ; P200.34@1112.4,1198.82 1112.4,1176.45 1126.85,1162 v1(1126.85,1145)
RADIO_PB12: P200.33 P201.23 U1.21 | length 2004.1
  Top w6: v1@620.85,1254 620.85,1253.48 648.02,1226.3 648.55,1226.3 ; 648.62,1226.38 654.53,1220.47 U1.21@673.23,1220.47
  Inner Layer 2 w6: 1066.85,364.03 1103.85,327.03 1103.85,318 ; 1066.85,364.08 1067.46,364.68 1067.46,814.77 1127.57,874.88 1127.57,1115.28 1100.85,1142 v1(1100.85,1143) ; 1103.87,318 1103.99,204.83 v1(1111.85,197)
  Inner Layer 3 w6: v1@622.85,1253 622.85,1250 685.85,1187 1056.85,1187 v1(1100.85,1143) 1100.35,1143.5 v1@1102.35,1145.5 ; v1(862.85,197) 862.85,181 881.85,162 1076.85,162 v1(1111.85,197)
  Bottom w6: P201.23@862.4,139.76 862.85,140.21 v1(862.85,197) ; v1(1100.85,1143) 1100.85,1142 1112.4,1130.45 P200.33@1112.4,1084.65
  other v1: 620.85,1254.35
RADIO_PB13: P200.32 P201.25 U1.22 | length 1877.5
  Top w6: v1@667.32,1144.69 U1.22@667.32,1202.76
  Inner Layer 2 w6: v1(923.85,78) 941.3,60.55 991.4,60.55 1090.85,160 1090.85,200.99 1090.8,201.04 1090.75,201.09 1090.75,208.57 1090.85,208.67 1090.85,323.06 1054.85,359.06 1054.85,369.05 1055.46,369.65 1055.46,819.74 1115.57,879.85 1115.57,1087.28 1074.85,1128 v1(1074.85,1141.79)
  Inner Layer 3 w6: v1(673.85,1141) 673.85,1153 695.85,1175 1041.63,1175 v1(1074.85,1141.79)
  Bottom w6: P201.25@912.4,139.76 923.85,128.32 v1(923.85,78) ; P200.32@1062.4,1198.82 1062.4,1153.15 1073.76,1141.79 v1(1074.85,1141.79)
RADIO_PB14: U1.23
RADIO_PB15: U1.24
RADIO_PC6: RP200.4 U1.33 U100.D2 | length 540.3
  Top w6: v1(806.85,1142.43) 830.61,1166.2 843.08,1166.2 850.39,1173.51 U1.33@850.39,1185.04 ; v1@813.85,1142.43 813.85,1132.13 824.98,1121 847.31,1121 855.31,1129 U100.D2@872.98,1129
  Inner Layer 3 w6: v1(806.85,1142.43) 806.85,1137 880.85,1063 880.85,1021.13 906.55,995.43 972.39,995.43 979.81,988 1083.42,988 v1(1084.13,988.72)
  Bottom w6: RP200.4@1058.38,988.72 v1(1084.13,988.72)
RADIO_PC7: RP200.1 U1.34 U100.C3 | length 547.8
  Top w6: v1@832.85,1139 866.14,1172.29 U1.34@866.14,1185.04 U1.34@865.35,1184.25 ; v1(842.52,1003.94) 855.85,1017.27 855.85,1084 880.85,1109 U100.C3@880.85,1115.22
  Inner Layer 2 w6: v1@829.85,1140 829.85,1138.56 816.85,1125.56 816.85,1025.13 837.06,1004.92 v1@842.52,1004.92
  Bottom w6: v1(842.52,1003.94) 846.52,1007.94 921.33,1007.94 938.13,991.14 938.13,969.14 949.84,957.43 965.58,957.43 981.6,973.44 981.6,973.72 996.59,988.72 RP200.1@999.32,988.72
  other v1: 832.85,1140
RADIO_PC8: RP200.2 U1.35 U100.E1 | length 346.8
  Top w6: U100.E1@865.1,1145.35 865.1,1150.25 881.89,1167.04 ; U1.35@881.89,1185.04 881.89,1167.04 ; v1(1013.82,1025.64) 1013.82,1142.68 989.46,1167.04 881.89,1167.04
  Bottom w6: v1(1013.82,1025.64) 1017.21,1025.64 1019.01,1023.84 RP200.2@1019.01,988.72
RADIO_PC9: P201.10 U1.36 | length 2290
  Top w6: U1.36@901.57,1204.72 1091.57,1204.72 1144.85,1258 v1(1145.85,1258)
  Inner Layer 2 w6: 1127.85,338 1091.46,374.39 1091.46,804.82 1151.57,864.94 1151.57,1125.88 1157.85,1132.16 1157.85,1243.33 1145.85,1255.33 v1(1145.85,1258) ; 1127.99,338 1127.99,271.83 1179.82,220 1213.85,220 v1(1236.85,197)
  Inner Layer 3 w6: v1(507.85,196) 507.85,193.13 574.98,126 1148.85,126 1217.85,195 1236.85,195 v1(1236.85,197)
  Bottom w6: v1(507.85,196) 507.85,249.39 P201.10@512.4,253.94
RADIO_PC10: P201.15 U1.37 | length 2010.6
  Top w6: U1.37@900.59,1220.47 U1.37@901.57,1220.47 915.35,1220.47 918.11,1217.72 1073.57,1217.72 1110.85,1255 v1(1110.85,1259)
  Inner Layer 2 w6: v1(1110.85,1259) 1145.85,1224 1145.85,1137.13 1139.57,1130.85 1139.57,869.91 1079.46,809.8 1079.46,368.39 1115.85,332 ; 1115.99,332 1115.99,266.86 v1(1183.85,199)
  Inner Layer 3 w6: v1(663.85,197) 722.85,138 1134.85,138 1180.85,184 1180.85,196 v1(1183.85,199)
  Bottom w6: P201.15@662.4,139.76 663.85,141.21 v1(663.85,197)
RADIO_PC11: P201.16 U1.38 | length 1527.3
  Top w6: U1.38@901.57,1236.22 923.23,1236.22 929.13,1230.31 ; 929.01,1230.19 929.49,1229.72 989.57,1229.72 1011.85,1252 v1(1011.85,1255)
  Inner Layer 2 w6: v1(971.49,335.65) 971.49,370.54 994.85,393.9 994.85,836.97 991.67,840.15 991.67,859.1 979.36,871.4 970.32,871.4 961.2,880.52 961.2,902.13 1044.82,985.75 1044.82,1105.16 1029.72,1120.26 1029.72,1132.09 1029.67,1132.15 1029.67,1214.16 1017.85,1225.97 1017.85,1246 v1@1010.85,1253 ; v1@1011.85,1253 v1(1011.85,1255)
  Inner Layer 3 w6: v1(652.85,310) 683.85,310 702.85,291 894.72,291 939.37,335.65 v1(971.49,335.65)
  Bottom w6: v1(652.85,310) 662.4,300.45 662.4,279.55 P201.16@662.4,253.94
RADIO_PD9: P200.4 U1.7 | length 528.4
  Top w6: v1(711.32,1343.2) 711.32,1340.45 730.07,1359.2 730.07,1377.07 724.28,1382.86 U1.7@724.28,1413.12
  Inner Layer 3 w6: v1(363.85,1255) 363.85,1262 385.85,1284 477.85,1284 508.85,1315 628.27,1315 649.46,1336.19 704.31,1336.19 v1(711.32,1343.2)
  Bottom w6: P200.4@363.85,1200.27 v1(363.85,1255)
RADIO_PD10: P201.7 U1.8 | length 1587.5
  Top w6: v1@708.66,1369.06 U1.8@708.66,1413.39
  Inner Layer 2 w6: v1@464.85,205 v1(464.85,197) 479.98,197 501.98,175 567.72,175 579.85,187.13 579.85,281.13 631.28,332.56 631.28,835.76 604.85,862.19 604.85,925.9 576.29,954.46 576.29,954.69 554.85,976.13 554.85,1015.09 543.35,1026.59 543.35,1264.63 579.1,1300.39 586.51,1300.39 601.12,1315 646.98,1315 702.98,1371 704.78,1369.2 v1(711.07,1369.2)
  Bottom w6: P201.7@462.4,139.76 462.4,194.55 v1(464.85,197)